# Altium PCB SX1262_e428v03a.PcbDoc
Units mm, origin at the board's own origin, x right, y up, seen from the top; angles counter-clockwise.
Board outline 89 x 58 mm, 4 copper layers (Top Layer, MidLayer1, MidLayer2, Bottom Layer), stack 0.986 mm thick; 72 components, 48 nets, 208 pads, 1257 vias.
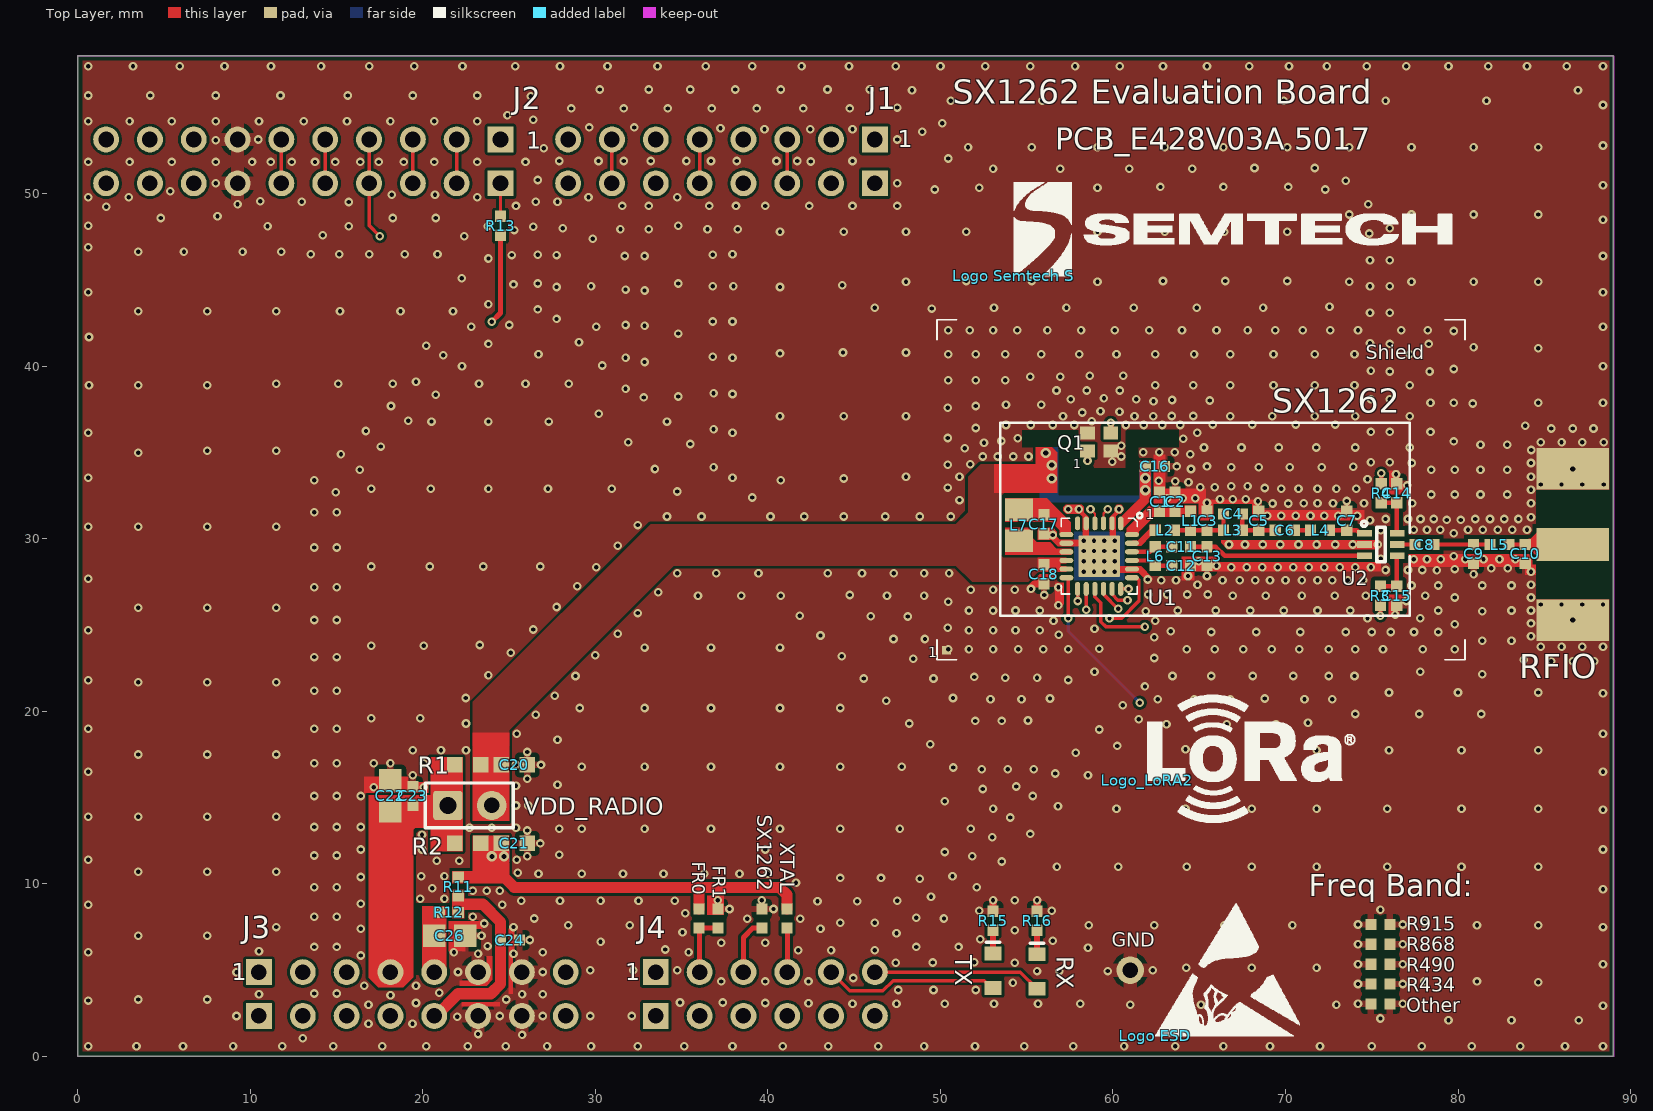
[diagram p0: Top Layer view]
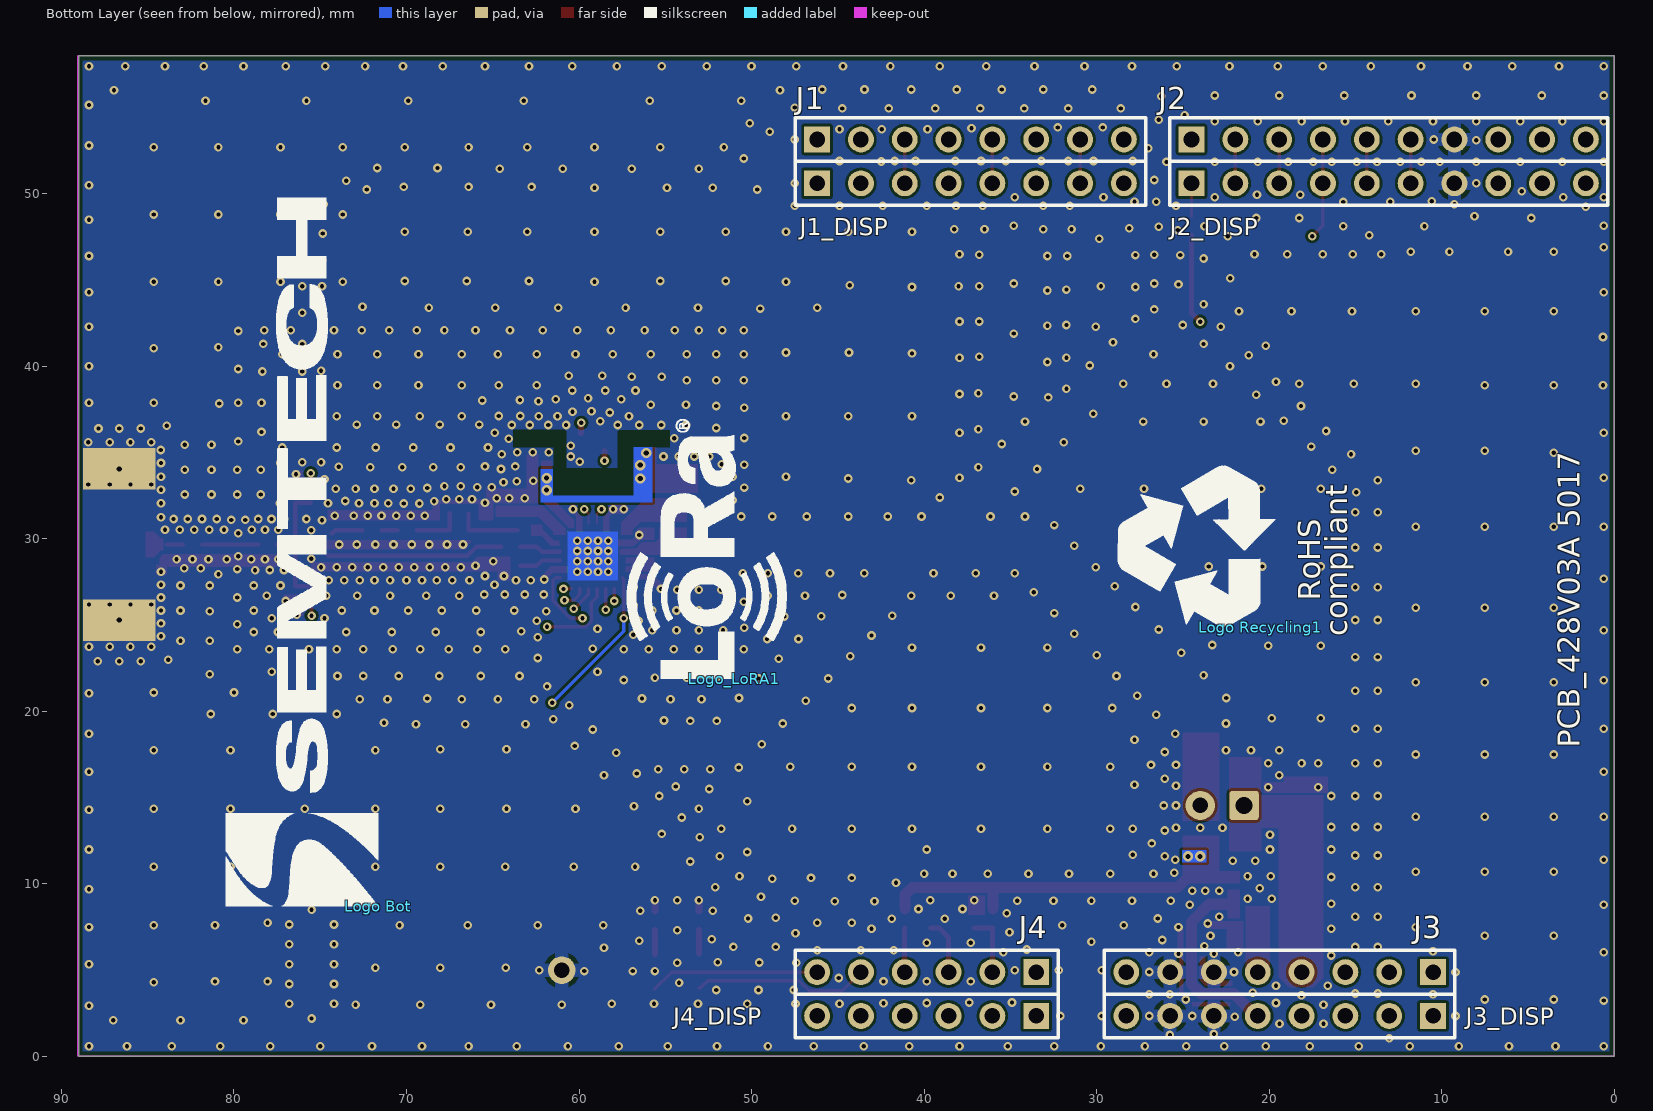
[diagram p1: Bottom Layer view, seen from below]
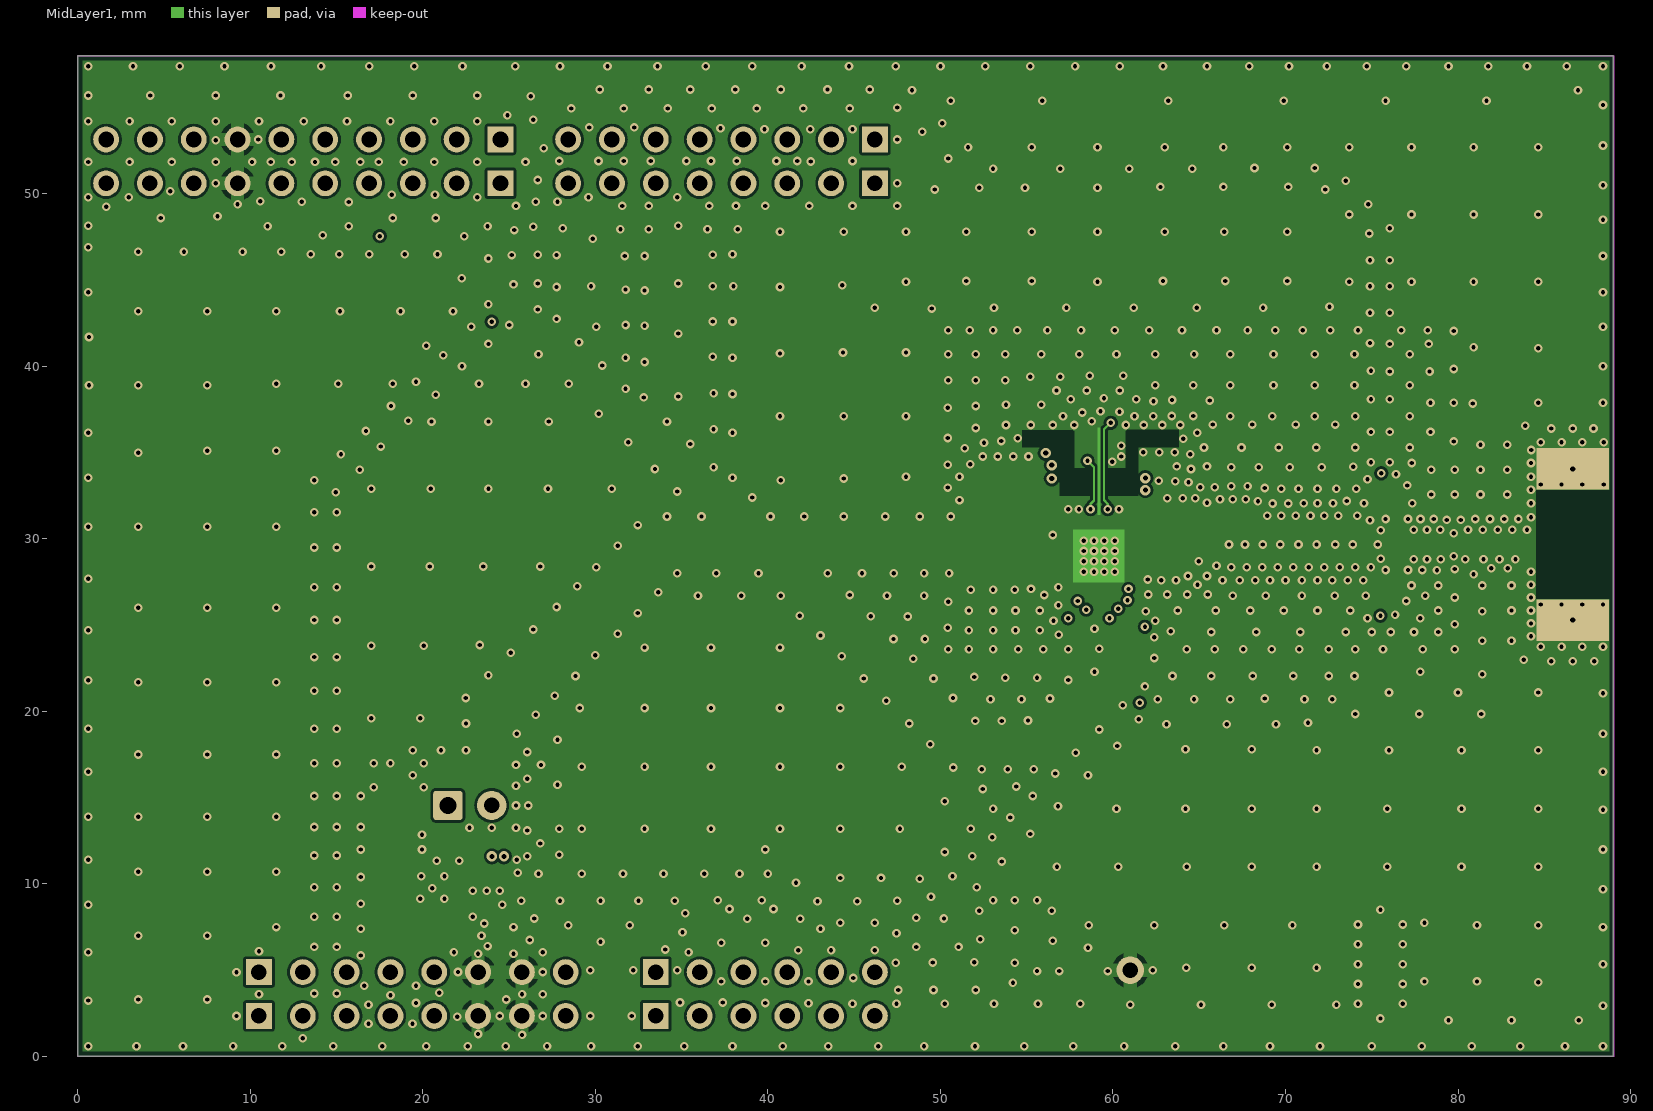
[diagram p2: MidLayer1]
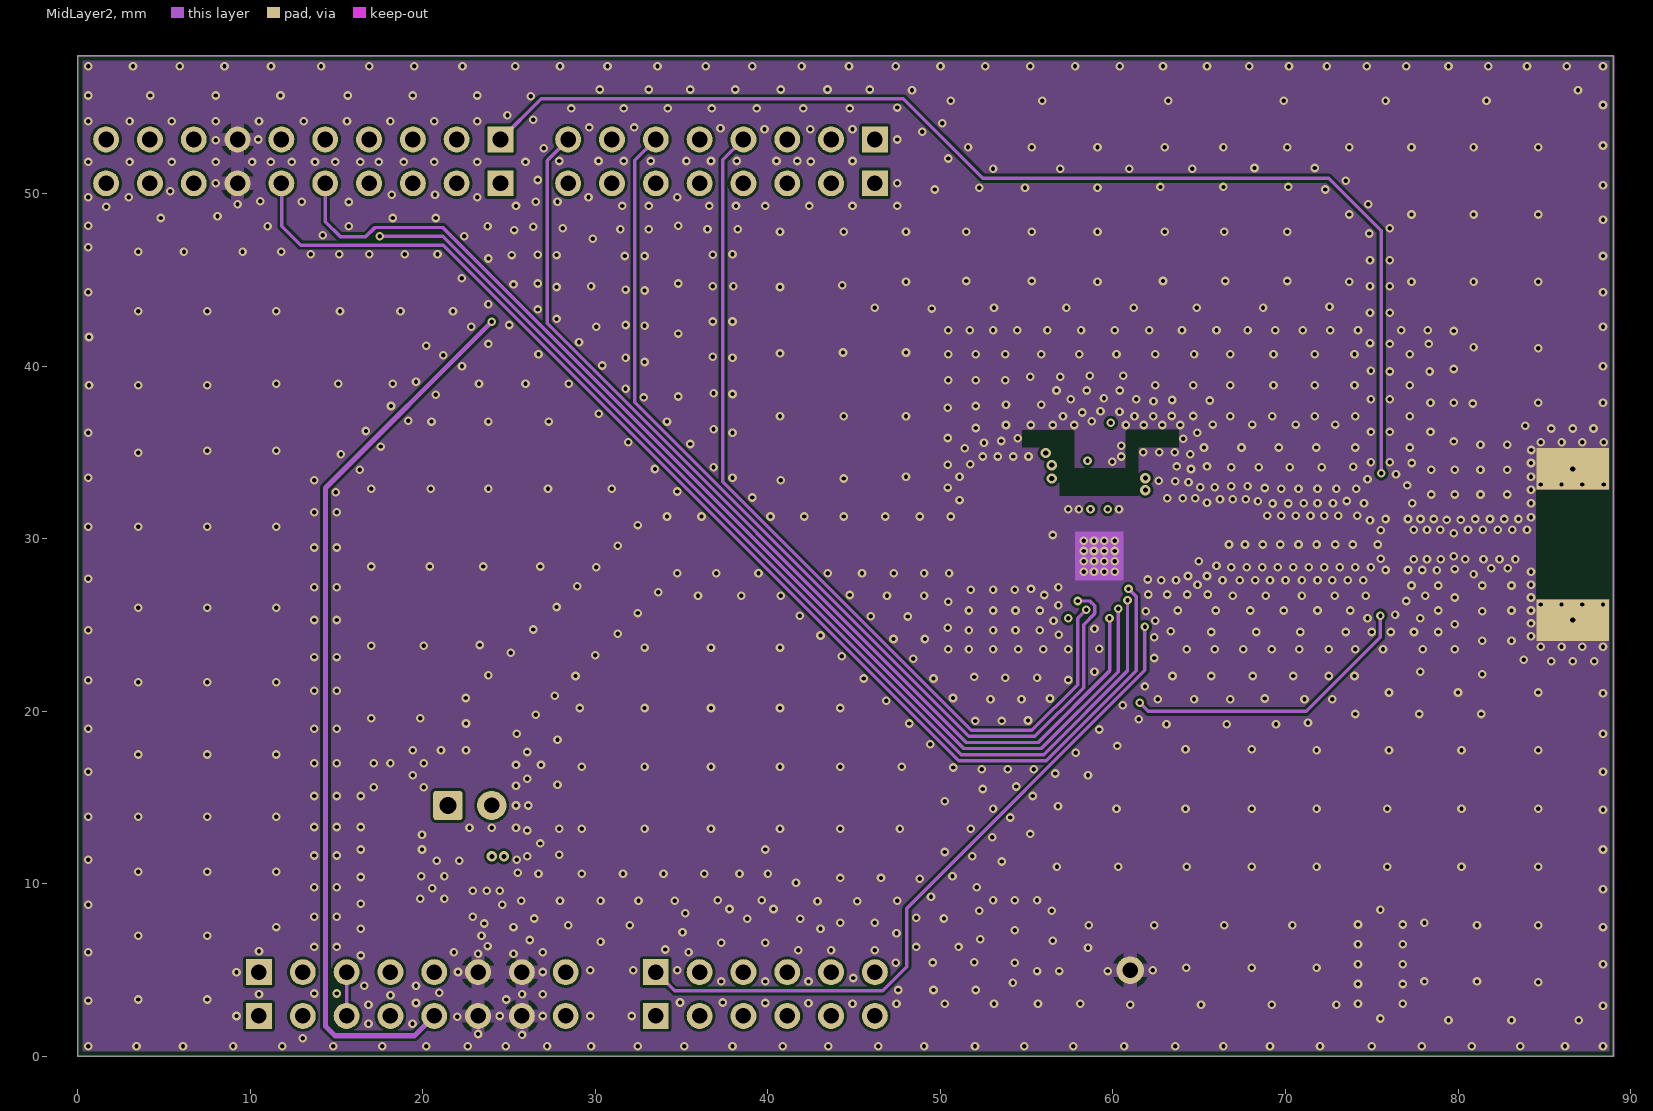
[diagram p3: MidLayer2]

## Layer stack, top to bottom
Top Solder: solder mask 0.0102, Solder Resist, Dk 3.5
Top Layer: signal copper 0.035
Dielectric1: core 0.15, FR-4, Dk 4.4
MidLayer1: signal copper 0.018
Dielectric3: prepreg 0.58, FR-4, Dk 4.4
MidLayer2: signal copper 0.018
Dielectric2: core 0.15, FR-4, Dk 4.4
Bottom Layer: signal copper 0.035
Bottom Solder: solder mask 0.0102, Solder Resist, Dk 3.5

## Board outline
0,0 0,58 89,58 89,0

## Design rules (kind name [scope] priority, off if disabled: settings)
Clearance Clearance_RF_GND [InNet('GND') And OnLayer('Top Layer') And (InPoly) vs InNet('NetL*') or InNet('NetC*') or InNet('NetU*')] p1: gap=0.25 ignorepadtopadclearanceinfootprint=FALSE except(0: Arc-Hole Track-Hole SMDPad-Hole THPad-Hole Via-Hole Fill-Hole Poly-Hole Region-Hole Text-Hole)
Clearance Clearance_GND_Keepout [InNet('GND') vs OnLayer('Keep-Out Layer')] p2: gap=0.15 ignorepadtopadclearanceinfootprint=FALSE except(0: Arc-Hole Track-Hole SMDPad-Hole THPad-Hole Via-Hole Fill-Hole Poly-Hole Region-Hole Text-Hole)
Clearance Clearance_GND [InNet('GND')] p3: gap=0.15 ignorepadtopadclearanceinfootprint=FALSE except(0: Arc-Hole Track-Hole SMDPad-Hole THPad-Hole Via-Hole Fill-Hole Poly-Hole Region-Hole Text-Hole)
Clearance [All] p4: gap=0.15 ignorepadtopadclearanceinfootprint=FALSE except(0: Arc-Hole Track-Hole SMDPad-Hole THPad-Hole Via-Hole Fill-Hole Poly-Hole Region-Hole Text-Hole)
ComponentClearance ComponentClearance_SMA_RFIO [InComponent('RFIO')] p1: gap=0.1 collisioncheckmode=3 verticalgap=0.1 showdistances=FALSE
ComponentClearance [All] p2: gap=0.2 collisioncheckmode=3 verticalgap=0.3 showdistances=FALSE
HoleSize [All] p1: absolutevalues=TRUE maxlimit=3.6 minlimit=0.25 maxpercent=80.000 minpercent=20.000
HoleToHoleClearance [All] p1: gap=0.2 allowstackedmicrovias=TRUE
MinimumSolderMaskSliver [All] p1: minsoldermaskwidth=0.04
PlaneClearance [All] p1: clearance=0.2
PlaneConnect [All] p1: planeconnectstyle=Direct reliefexpansion=0.508 reliefentries=4 reliefconductorwidth=0.254 reliefairgap=0.254
PolygonConnect "PolygonConnect SMD" [InNet('GND') vs HasFootprint('rlc_603_smd') or HasFootprint('rlc_402_smd') or hasFootprint('rlc_805_smd')  or hasFootprint('SOT353-5') or hasFootprint('VQFN24_4X4MM')   or HasFootprint('DFN6_3X3mm')   or HasFootprint('ODFN6_1.65X1.65mm')] p1: connectstyle=Relief reliefconductorwidth=0.4 reliefentries=4 polygonreliefangle="90 Angle" airgapwidth=0.254
PolygonConnect PolygonConnect_comp_diverse [InNet('GND') or  InNet('VDD_MBED') or  InNet('VDD_DISPLAY')  or  InNet('VDD_3V3')  or  InNet('VDD_RADIO')  or  InNet('VUSB') vs HasFootprint('LGM676 LED') or  HasFootprint('BRIDGE_254MM') or  HasFootprint('pin_0.9mm') or HasFootprint('SMA_STRAIGHT')  or  HasFootprint('HDR2X8')   or  HasFootprint('HDR2X6')  or  HasFootprint('HDR1X10') or  HasFootprint('vqfn20_3x3mm') or  HasFootprint('HDR1X9') or  HasFootprint('HDR1X8')  or  HasFootprint('HDR1X6') or  HasFootprint('HDR1X4')] p2: connectstyle=Relief reliefconductorwidth=0.8 reliefentries=4 polygonreliefangle="90 Angle" airgapwidth=0.254
PolygonConnect PolygonConnect_all [All] p3: connectstyle=Direct reliefconductorwidth=0.6 reliefentries=4 polygonreliefangle="90 Angle" airgapwidth=0.254
RoomDefinition SX1262_e428v03a [InComponentClass('SX1262_e428v03a')] p1: confinementstyle=ConfineOut formatcopy=TRUE lockcomponents=FALSE outline 13.5,81.35 13.45,81.4 13.45,124.35 67.45,124.35 67.3,124.2 67.3,81.35
RoutingVias [All] p1: holewidth=0.3 width=0.6 viastyle="Through Hole" minholewidth=0.25 minwidth=0.5 maxholewidth=0.4 maxwidth=0.8
SilkToSilkClearance [All] p1: silktosilkclearance=0.05
SilkToSolderMaskClearance SilkscreenOverComponentPads [IsPad] p1: minsilkscreentomaskgap=0.05 clearancetoexposedcopper=TRUE
SolderMaskExpansion [All] p1: expansion=0.05
Width "Width GND" [InNet('GND')] p1: maxlimit=3 minlimit=0.2 preferedwidth=0.4
Width Width_VCC [InNet('VDD') or  InNet('VDISPLAY') or  InNet('VDD_MBED')  or  InNet('VUSB')  or  InNet('VDD_3V3')] p2: maxlimit=2 minlimit=0.2 preferedwidth=0.8
Width "Width All" [All] p3: maxlimit=2 minlimit=0.127 preferedwidth=0.2
22 further rules are at their usual default settings.

## Components (designator, comment, footprint, x,y, rotation, side; value= is the part's Value field where it differs from the comment)
C1 "Cap" RLC_402_SMD 62.7,32.15 r270 top value=NC
C2 "Cap" RLC_402_SMD 63.6,32.15 r270 top value=NC
C3 "Cap" RLC_402_SMD 65.45,31.05 r270 top value=NC
C4 "Cap" RLC_402_SMD 66.95,31.45 r180 top value=NC
C5 "Cap" RLC_402_SMD 68.45,31.05 r270 top value=NC
C6 "Cap" RLC_402_SMD 69.95,30.5 r180 top value=NC
C7 "Cap" RLC_402_SMD 73.55,31.05 r270 top value=NC
C8 "Cap" RLC_402_SMD 78.05,29.675 r180 top value=NC
C9 "Cap" RLC_402_SMD 80.9,29.125 r90 top value=NC
C10 "Cap" RLC_402_SMD 83.9,29.125 r90 top value=NC
C11 "Cap" RLC_402_SMD 63.95,29.55 r180 top value=NC
C12 "Cap" RLC_402_SMD 63.95,28.45 r180 top value=NC
C13 "Cap" RLC_402_SMD 65.45,29 r90 top value=NC
C14 "Cap" RLC_402_SMD 76.45,32.65 r90 top value=1nF
C15 "Cap" RLC_402_SMD 76.45,26.7 r270 top value=1nF
C16 "Cap" RLC_402_SMD 62.425,34.2 r180 top value=1uF
C17 "Cap" RLC_402_SMD 56,30.85 r90 top value=470nF
C18 "Cap" RLC_402_SMD 56,27.95 r90 top value=100nF
C20 "Cap" rlc_603_smd 25.3,16.9 r180 top value=1uF
C21 "Cap" rlc_603_smd 25.3,12.35 r180 top value=1uF
C22 "Cap" rlc_805_smd 18.12,15.1 r270 top value=10uF
C23 "Cap" RLC_402_SMD 19.42,15.1 r270 top value=100nF
C24 "Cap" RLC_402_SMD 25.05,6.75 r180 top value=1uF
C26 "Cap" rlc_805_smd 21.55,7 r180 top value=10uF
FR0 "Resistor" RLC_402_SMD 36,8 r270 top value=1k
FR1 "Resistor" RLC_402_SMD 37.1,8 r270 top value=NC
GND "Test Pin" pin_0.9mm 61,5 r90 top
J1 "Header 8" HDR1X8 46.2,53.15 r180 bottom locked
J1_DISP "Header 8" HDR1X8 46.2,50.61 r180 bottom locked
J2 "Header 10" HDR1X10 24.5,53.15 r180 bottom locked
J2_DISP "Header 10" HDR1X10 24.5,50.61 r180 bottom locked
J3 "Header 8" HDR1X8 10.5,4.89 r0 bottom locked
J3_DISP "Header 8" HDR1X8 10.5,2.35 r0 bottom locked
J4 "Header 6" HDR1X6 33.5,4.89 r0 bottom locked
J4_DISP "Header 6" HDR1X6 33.5,2.35 r0 bottom locked
L1 "Inductor" RLC_402_SMD 64.5,31.05 r90 top value=0R
L2 "Inductor" RLC_402_SMD 63,30.5 r0 top value=0R
L3 "Inductor" RLC_402_SMD 66.95,30.5 r0 top value=0R
L4 "Inductor" RLC_402_SMD 72,30.5 r0 top value=0R
L5 "Inductor" RLC_402_SMD 82.4,29.675 r0 top value=0R
L6 "Inductor" RLC_402_SMD 62.45,29 r90 top value=0R
L7 "Inductor" "rlc_805_smd enlarged" 54.55,30.8 r270 top value=15uH
"Logo Bot" "Logo symbol" logo_semtech_horiz_size4 71.65,8.7 r90 bottom
"Logo ESD" "Logo symbol" "Logo ESD" 62.454,1.2 r0 top
"Logo Recycling1" "Logo symbol" "Logo Recycling1" 20.527,24.87 r90 bottom
"Logo Semtech S" "Logo symbol" logo_semtech_horiz_size3 54.25,45.25 r0 top
Logo_LoRA1 "Logo symbol" "LOGO LORA SIZE4" 51,21.9 r90 bottom
Logo_LoRA2 "Logo symbol" "LOGO LORA SIZE3" 62,16 r0 top
Other "Resistor" RLC_402_SMD 75.5,3.05 r0 top value=NC
Q1 "Xtal" nd2016da 59.2,35.625 r0 top locked value=32.0MHz
R1 "Resistor" rlc_603_smd 22.6,16.9 r180 top value=NC
R2 "Resistor" rlc_603_smd 22.6,12.35 r180 top value=0R
R3 "Resistor" RLC_402_SMD 75.5,26.7 r270 top value=100R
R4 "Resistor" RLC_402_SMD 75.55,32.65 r90 top value=100R
R11 "Resistor" RLC_402_SMD 22.05,9.85 r270 top value=NC
R12 "Resistor" RLC_402_SMD 21.5,8.35 r0 top value=0R
R13 "Resistor" RLC_402_SMD 24.5,48.15 r90 top value=10k
R15 "Resistor" RLC_402_SMD 53.05,7.871 r270 top value=330R
R16 "Resistor" RLC_402_SMD 55.6,7.871 r270 top value=330R
R434 "Resistor" RLC_402_SMD 75.5,4.2 r0 top value=NC
R490 "Resistor" rlc_402_smd 75.5,5.35 r180 top value=NC
R868 "Resistor" RLC_402_SMD 75.5,6.5 r0 top value=NC
R915 "Resistor" RLC_402_SMD 75.5,7.65 r180 top value=NC
RFIO "SMA" SMA_end_launch_1.0mm_9.52mm 86.65,29.675 r0 top locked
RX "LED" "LGM676 LED" 55.6,4.921 r90 top value=GREEN
Shield "Logo symbol" "BMIS-209-F - SHIELD - SOLDER_MASK" 50.35,23.55 r0 top locked
SX1262 "Resistor" RLC_402_SMD 39.65,8 r270 top value=10k
TX "LED" "LGM676 LED" 53.05,4.971 r90 top value=RED
U1 "SX1262" VQFN24_4X4MM 59.2,29 r270 top
U2 "PE4259 RF Switch" SC70-6 75.525,29.675 r0 top
VDD_RADIO "Jumper" BRIDGE_254MM 21.45,14.55 r0 top
XTAL "Resistor" rlc_402_smd 41.1,8 r270 top value=1k

## Footprints (in the part's own frame and the unit in brackets; to place one, negate y for a bottom-side part, rotate by r counter-clockwise, add the part's x,y. Pads: shape width x height; smd on the part's side, far side on the other; paste and mask are expansions set on the pad)
"BMIS-209-F - SHIELD - SOLDER_MASK" [mm] "BMIS-209-F EMI Gasket - modif SolderMask - Standard Surface Mount Shields -  Laird Technologies"
  rect 0.5x0.5 smd paste-1 mask+0.05: 1(0,0)
  Mechanical 15 keep-out lines w1: 0,0 29.5,0 29.5,18.6 0,18.6 0,0
  silkscreen extent -0.55,-0.55 30.05,19.15, body extent -0.3,-0.3 0.3,0.3, height 0.8
BRIDGE_254MM [mm] "Generic Bridge 2.54mm, 2 Leads 0.9mm;"
  rrect20% 1.7x1.7 hole 1 paste+0 mask+0.05: 1(0,0)
  round 1.7 hole 0.9 paste+0 mask+0.05: 2(2.54,0)
  silkscreen extent -1.3,-1.3 3.8,1.3, body extent -1.4,-1.4 3.9,1.4, height 1
HDR1X6 [mm] "Connector; Header; 6 Position"
  rect 1.5x1.5 hole 0.9: 1(0,0)
  round 1.5 hole 0.9: 2(2.54,0) 3(5.08,0) 4(7.62,0) 5(10.16,0) 6(12.7,0)
  silkscreen extent -1.27,-1.27 13.97,1.27, body extent -0.8,-0.8 13.5,0.8
HDR1X8 [mm] "Connector; Header; 8 Position"
  rect 1.5x1.5 hole 0.9: 1(0,0)
  round 1.5 hole 0.9: 2(2.54,0) 3(5.08,0) 4(7.62,0) 5(10.16,0) 6(12.7,0) 7(15.24,0) 8(17.78,0)
  silkscreen extent -1.27,-1.27 19.05,1.27, body extent -0.8,-0.8 18.58,0.8
HDR1X10 [mm] "Connector; Header; 10 Position"
  rect 1.5x1.5 hole 0.9: 1(0,0)
  round 1.5 hole 0.9: 2(2.54,0) 3(5.08,0) 4(7.62,0) 5(10.16,0) 6(12.7,0) 7(15.24,0) 8(17.78,0) 9(20.32,0) 10(22.86,0)
  silkscreen extent -1.27,-1.27 24.13,1.27, body extent -0.8,-0.8 23.66,0.8
"LGM676 LED" [mm] "Chip Diode; Body 2.1 x 1.4 mm (LxW typ)"
  rect 0.8x1 smd mask+0.05: 1(-1,0) 2(1,0)
  silkscreen extent 1.65,-0.4 1.65,0.4, body extent -1.2,-0.7 1.2,0.7, height 12
"Logo ESD" [mm] "Logo ESD"
  silkscreen extent 0,0 8.38,7.67
"LOGO LORA SIZE3" [mm] "Logo LoRa Size3 - Top Overlay - 14.5x8mm - Registered"
  silkscreen extent 0,-2.44 12.03,4.96
"LOGO LORA SIZE4" [mm] "Logo LoRa Size4 - Top Overlay - 18x9.5mm - Registered"
  silkscreen extent 0,-3.05 15.04,6.2
"Logo Recycling1" [mm] "Logo Recycling1"
  silkscreen extent 0.05,-0.88 9.36,8.2
logo_semtech_horiz_size3 [mm] "Logo semtech horizontal - size3 - L"
  silkscreen extent 0,0 25.4,5.41
logo_semtech_horiz_size4 [mm] "Logo semtech horizontal - size4 - XL"
  silkscreen extent 0,0 41.07,8.79
nd2016da [mm] "Crystal SMD 2.0x1.6mm"
  rect 0.85x0.75 smd mask+0.05: 1(-0.675,-0.525) 2(0.675,-0.525) 3(0.675,0.525) 4(-0.675,0.525)
  body extent -1,-0.8 1,0.8, height 1
pin_0.9mm [mm] "Generic Pin 0.9mm; 1 Lead"
  round 1.6 hole 0.9 mask+0.05: 1(0,0)
RLC_402_SMD [mm] "Chip SMD component 402; Body 1.0 x 0.5 mm (LxW typ)"
  rect 0.65x0.65 smd mask+0.05: 1(-0.55,0) 2(0.55,0)
  body extent -0.87,-0.33 0.87,0.33, height 0.8
rlc_402_smd [mm] "Chip SMD component 402; Body 1.0 x 0.5 mm (LxW typ)"
  rect 0.65x0.65 smd mask+0.05: 1(-0.55,0) 2(0.55,0)
  body extent -0.87,-0.33 0.87,0.33, height 0.8
rlc_603_smd [mm] "Chip SMD component 603; Body 1.6 x 0.8mm (LxW typ)"
  rect 0.9x0.9 smd paste+0 mask+0.05: 1(-0.75,0) 2(0.75,0)
rlc_805_smd [mm] "Chip SMD component 805; Body 2.0 x 1.25 mm (LxW typ)"
  rect 1.3x1.3 smd mask+0.05: 1(-0.9,0) 2(0.9,0)
"rlc_805_smd enlarged" [mm] "Chip SMD component 805; Body 2.0 x 1.25 mm (LxW typ)"
  rect 1.3x1.6 smd mask+0.05: 1(-0.9,0) 2(0.9,0)
SC70-6 [mm] "SC70 6-Leads, Body 2.0x1.25mm, Pitch 0.65mm"
  rect 0.85x0.4 smd mask+0.05: 1(-0.95,0.65) 2(-0.95,0) 3(-0.95,-0.65) 4(0.95,-0.65) 5(0.95,0) 6(0.95,0.65)
  silkscreen extent -1.12,-1 0.25,1.35, body extent -0.63,-1 0.63,1, height 1.45
SMA_end_launch_1.0mm_9.52mm [mm] "SMA end launch for 1.0mm PCB thickness; 9.52mm"
  rect 4.2x1.905 smd mask+0.05: 1(0,0)
  rect 4.2x2.413 hole 0.3 mask+0.05: 2(0,-4.38) 2(0,4.38)
VQFN24_4X4MM [mm] "24 Leads, Body 4.0x4.0mm, Pitch 0.50mm, VQFN24"
  oval 0.8x0.3 smd mask+0.05: 1(-1.9,1.25) 2(-1.9,0.75) 3(-1.9,0.25) 4(-1.9,-0.25) 5(-1.9,-0.75) 6(-1.9,-1.25) 13(1.9,-1.25) 14(1.9,-0.75) 15(1.9,-0.25) 16(1.9,0.25) 17(1.9,0.75) 18(1.9,1.25)
  oval 0.3x0.8 smd mask+0.05: 7(-1.25,-1.9) 8(-0.75,-1.9) 9(-0.25,-1.9) 10(0.25,-1.9) 11(0.75,-1.9) 12(1.25,-1.9) 19(1.25,1.9) 20(0.75,1.9) 21(0.25,1.9) 22(-0.25,1.9) 23(-0.75,1.9) 24(-1.25,1.9)
  rrect5% 2.4x2.4 smd paste-2.5 mask+0.05: 25(0,0)
  Mechanical 15 keep-out lines w0.1: 2.5,-2.5 2.5,2.5 -2.5,2.5 -2.5,-2.5 2.5,-2.5
  silkscreen extent -2.5,-2.2 2.2,2.5, body extent -2,-2 2,2, height 1

## Part data
C1 C2 C3 C4 C5 C6 C7 C8 C9 C10 C11 C12 C13 C14 C15 C16 C17 C18 C20 C21 C22 C23 C24 C26: "Capacitor SMD", LatestRevisionDate="05-oct-2007  -  Semtech", LatestRevisionNote="Re-released for DXP Platform.", Published=8-Jun-2000, Publisher="Altium Limited"
FR0 FR1 Other R1 R2 R3 R4 R11 R12 R13 R15 R16 R434 R490 R868 R915 SX1262 XTAL: "Resistor SMD - IEC symbol version", LatestRevisionDate="27-Jul-20  -  Semtech"
GND: library part test_pin, LatestRevisionDate="05-oct-2007  -  Semtech"
J1 J1_DISP J3 J3_DISP: "Header, 8-Pin", LatestRevisionDate=17-Jul-2002, LatestRevisionNote="Re-released for DXP Platform.", Publisher="Altium Limited"
J2 J2_DISP: "Header, 10-Pin", LatestRevisionDate=17-Jul-2002, LatestRevisionNote="Re-released for DXP Platform.", Publisher="Altium Limited"
J4 J4_DISP: "Header, 6-Pin", LatestRevisionDate=17-Jul-2002, LatestRevisionNote="Re-released for DXP Platform.", Publisher="Altium Limited"
L1 L2 L3 L4 L5 L6 L7: "Inductor SMD", Code_IEC=1005, Code_JEITA=0402, LatestRevisionDate="05-oct-2007  -  Semtech", LatestRevisionNote="Re-released for DXP Platform.", Published=8-Jun-2000, Publisher="Altium Limited"
"Logo Bot" "Logo ESD" "Logo Recycling1" "Logo Semtech S" Logo_LoRA1 Logo_LoRA2: library part Logo, "Schematic symbol for Logo"
Q1: library part "Xtal GND", "Crystal with GND pins", LatestRevisionDate="05-oct-2007  -  Semtech"
RFIO: "SMA Straight Connector", LatestRevisionDate="05-oct-2007  -  Semtech", LatestRevisionNote="Re-released for DXP Platform.", Publisher="Altium Limited"
Shield: library part Shield, "Shield - EMI Gasket - Standard Surface Mount Shields"
U1: library part SX126x, "SX1262- Ultra low power RF transceiver"
U2: "PE4259 Peregrine RF Switch", LatestRevisionDate="03-Sep-2012 -  Semtech"
VDD_RADIO: "Jumper Wire", LatestRevisionDate="05-oct-2007  -  Semtech"
RX TX: LatestRevisionDate="05-oct-2007  -  Semtech"

## Via types
v1: diameter 0.5, hole 0.25, Top Layer to Bottom Layer, tented both sides, 1234 vias
v2: diameter 0.5, hole 0.25, Top Layer to Bottom Layer, tented top, 16 vias
v3: diameter 0.6, hole 0.3, Top Layer to Bottom Layer, tented both sides, 7 vias

## Nets (pads, with @x,y where several pads share a name; then routed paths per layer and width w, separated by ;. In a path a pad name is that pad's centre, name@x,y a point inside that pad or via, vN(x,y) a via of type N, cw(c..) or ccw(c..) an arc to the next point about the centre after c; other vN are vias at no path point)
ANT_SW: J2.1 R4.2 | length 69.8
  Top Layer w0.25: R4.2 v1(75.55,33.8)
  MidLayer2 w0.2: J2.1 26.85,55.5 47.85,55.5 52.45,50.9 72.5,50.9 75.55,47.85 v1(75.55,33.8)
BUSY: J1.4 U1.14 | length 53.7
  Top Layer w0.2: v1(58.45,25.9) U1.14
  MidLayer2 w0.2: J1.4@38.575,53.15 37.39,51.965 37.39,33.305 51.795,18.9 55.3,18.9 57.95,21.55 57.95,25.4 v1(58.45,25.9)
DIO1: J1.6 U1.13 | length 57.8
  Top Layer w0.2: v1(57.95,26.4) U1.13
  MidLayer2 w0.2: J1.6 32.286,51.936 32.286,37.914 51.65,18.55 55.475,18.55 58.3,21.375 58.3,25.025 58.95,25.675 58.95,26.114 58.664,26.4 v1(57.95,26.4)
DIO2: R3.2 U1.12 | length 26.8
  Top Layer w0.2: v1(57.4,25.4) 57.4,27.65 U1.12@57.5,27.75
  Top Layer w0.25: v1(75.5,25.55) R3.2
  MidLayer2 w0.2: v1(61.55,20.5) 62.05,20 71.199,20 75.5,24.301 v1(75.5,25.55)
  Bottom Layer w0.2: v1(57.4,25.4) 57.399,24.651 v1(61.55,20.5)
DIO3: U1.6
DISP_RESET: J3.3 J3_DISP.3 | length 2.5
  Top Layer w0.3: J3.3@15.58,4.87 J3.3@15.6,4.89
  MidLayer2 w0.2: J3_DISP.3 J3.3@15.58,4.87
F_CS: J1.7 J1_DISP.7 | length 2.6
  Top Layer w0.2: J1.7@30.95,53.175 30.96,53.165 J1.7 J1_DISP.7
GND: C1.1 C2.1 C3.1 C5.1 C7.1 C9.1 C10.1 C12.1 C13.1 C14.2 C15.2 C16.1 C17.1 C18.1 C20.1 C21.1 C22.1 C23.1 C24.1 C26.1 FR1.1 GND.1 J2.7 J2_DISP.7 J3.6 J3.7 J3_DISP.6 J3_DISP.7 Other.1 Other.2 Q1.2 Q1.4 R15.1 R16.1 R434.1 R434.2 R490.1 R490.2 R868.1 R868.2 R915.1 R915.2 RFIO.2 Shield.1 SX1262.1 U1.2 U1.5 U1.8 U1.20 U1.25 U2.2 | length 5.3
  Top Layer w0.3: U1.8 U1.25@58.3,29.75 ; U1.25@58.45,29.85 U1.5 ; U1.25@59.95,29.9 U1.2 ; U1.25@60.1,28.2 60.15,28.25 U1.20
  Top Layer w0.4: R15.1 v1@53.05,9.021 ; R16.1 v1(55.6,9.05)
  other v1: 0.6,0.6 3.4,0.6 6.1,0.6 9,0.6 11.85,0.6 14.8,0.6 17.65,0.6 20.2,0.6 22.6,0.6 24.8,0.6 27.2,0.6 29.75,0.6 32.45,0.6 35.15,0.6 37.95,0.6 40.85,0.6 43.5,0.6 46.4,0.6 49.05,0.6 52,0.6 54.85,0.6 57.7,0.6 60.643,0.6 63.6,0.6 66.4,0.6 69.1,0.6 72,0.6 75,0.6 77.9,0.6 80.8,0.6 83.6,0.6 86.2,0.6 88.4,0.6 13.04,1.05 25.75,1.25 23.2,1.3 16.85,1.9 19.4,1.9 79.45,2.1 83.1,2.1 87,2.1 75.5,2.2 22,2.3 9.2,2.35 24.45,2.35 26.95,2.35 29.7,2.35 32.1,2.35 88.4,2.938 16.85,3 61,3 65.1,3 69.2,3 72.95,3 44.9,3.05 47.45,3.05 50.25,3.05 53.1,3.05 55.65,3.05 58.1,3.05 74.2,3.05 76.8,3.05 19.6,3.1 39.85,3.1 42.35,3.088 34.9,3.13 37.39,3.13 0.6,3.241 3.5,3.3 7.5,3.3 24.829,3.3 18.125,3.55 10.5,3.6 25.75,3.6 26.95,3.6 13.7,3.65 15,3.65 20.95,3.7 47.55,3.85 49.6,3.85 52.05,3.85 16.6,4.1 19.6,4.1 74.2,4.2 76.8,4.2 54.2,4.279 84.65,4.3 37.3,4.35 39.85,4.35 42.35,4.35 78.05,4.35 81.1,4.35 44.95,4.55 9.2,4.89 22.035,4.9 26.95,4.9 55.6,4.95 56.886,4.95 59.7,4.95 29.7,5 32.2,5 34.75,5 62.3,5 64.25,5.15 68.05,5.15 71.8,5.15 88.4,5.338 74.2,5.35 76.8,5.35 47.4,5.435 54.3,5.435 49.55,5.45 51.95,5.464 16.4,5.85 23.2,5.95 25.25,5.95 0.6,6.05 21.8,6.05 26.95,6.05 35.4,6.05 10.5,6.1 41.75,6.15 43.66,6.15 46.2,6.15 34.046,6.2 58.55,6.3 13.7,6.35 15,6.35 48.6,6.35 51.05,6.35 23.75,6.4 74.2,6.5 76.8,6.5 37.3,6.6 39.85,6.6 30.3,6.65 56.5,6.7 26.2,6.75 52.3,6.8 3.5,7 7.5,7 23.4,7 47.45,7.15 35.05,7.2 54.3,7.321 16.4,7.4 43.05,7.4 11.5,7.5 25.25,7.5 88.4,7.5 28.42,7.6 32,7.6 58.6,7.6 62.4,7.6 66.45,7.6 70.4,7.6 81.1,7.6 84.65,7.6 74.2,7.65 76.8,7.65 23.55,7.709 44.2,7.75 46.2,7.75 78.05,7.75 38.8,7.982 41.875,7.98 26.45,8 50.2,8 48.6,8.05 13.7,8.1 15,8.1 22.9,8.1 35.2,8.3 52.25,8.45 56.45,8.45 75.5,8.5 37.775,8.55 40.325,8.55 0.6,8.8 24.6,8.8 16.4,8.85 25.7,9.021 27.95,9.021 30.3,9.021 32.5,9.021 34.6,9.021 42.875,9 45.175,9 47.5,9.021 37.1,9.05 39.65,9.05 53.05,9.05 54.3,9.05 19.85,9.15 21.25,9.15 49.45,9.25 22.9,9.6 23.7,9.6 24.45,9.6 88.4,9.7 20.55,9.75 13.7,9.8 15,9.8 52.1,9.8 41.625,10.075 48.8,10.3 44.2,10.35 46.55,10.35 16.4,10.4 19.9,10.45 21.25,10.45 50.7,10.45 26.7,10.6 29.2,10.6 31.6,10.6 33.95,10.6 36.3,10.6 38.35,10.6 40,10.6 25.5,10.65 3.5,10.7 7.5,10.7 11.5,10.7 56.75,11 60.3,11 64.275,11 68.05,11 71.8,11 75.9,11 80.2,11 84.65,11 53.55,11.3 20.8,11.35 22.1,11.35 0.6,11.4 25.45,11.4 26.05,11.6 51.85,11.6 13.7,11.65 15,11.65 27.9,11.7 50.25,11.85 16.4,12 19.95,12 39.85,12 88.4,12 26.8,12.35 53,12.7 19.95,12.85 55.2,12.9 26.05,13.1 27.9,13.2 29.2,13.2 32.85,13.2 36.7,13.2 40.7,13.2 44.2,13.2 47.65,13.2 51.75,13.2 22.7,13.25 24,13.25 25.4,13.25 13.7,13.3 15,13.3 16.4,13.3 54.05,13.85 0.6,13.9 3.5,13.9 7.5,13.9 11.5,13.9 88.4,14.3 53.05,14.35 60.2,14.35 64.2,14.35 68.05,14.35 71.8,14.35 75.9,14.35 80.2,14.35 84.65,14.35 56.81,14.5 25.4,14.55 26.1,14.55 50.25,14.8 13.7,15.1 15,15.1 16.4,15.1 55.35,15.1 52.45,15.5 17.15,15.6 20.05,15.6 54.4,15.65 25.4,15.7 27.8,15.75 26.05,16.1 19.42,16.3 58.55,16.3 56.65,16.4 0.6,16.5 88.4,16.5 52.4,16.65 53.9,16.65 55.4,16.65 50.75,16.75 29.2,16.8 32.85,16.8 36.7,16.8 40.7,16.8 44.2,16.8 47.75,16.8 25.4,16.9 26.85,16.9 13.7,17 15,17 17.15,17 18.12,17 20.05,17 3.5,17.5 7.5,17.5 11.5,17.5 57.85,17.6 26.05,17.65 19.42,17.75 21.05,17.75 22.5,17.75 71.8,17.75 76,17.75 80.2,17.75 84.65,17.75 64.2,17.8 68.05,17.8 60.25,18 49.4,18.1 27.8,18.35 25.45,18.7 88.4,18.7 59.2,18.95 0.6,19 13.7,19 15,19 63.1,19.25 66.6,19.25 69.45,19.25 22.5,19.3 48.2,19.3 71.3,19.35 52.025,19.45 53.55,19.45 55.075,19.475 61.5,19.55 17,19.6 19.85,19.6 26.55,19.8 74.05,19.85 77.75,19.85 81.35,19.85 29.1,20.2 32.85,20.2 36.7,20.2 40.7,20.2 44.2,20.2 60.574,20.35 46.85,20.625 52.9,20.7 54.7,20.7 62.6,20.7 64.7,20.7 66.8,20.7 71.1,20.7 72.7,20.7 56.35,20.75 68.8,20.75 22.477,20.78 50.725,20.775 27.65,20.9 88.4,21.05 76,21.1 80,21.1 84.65,21.1 13.7,21.2 15,21.2 61.85,21.45 3.5,21.7 7.5,21.7 11.5,21.7 0.6,21.8 57.4,21.825 45.55,21.907 49.6,21.907 53.75,21.95 55.6,21.95 51.95,22 28.85,22.05 63.45,22.05 65.7,22.05 68.1,22.05 70.45,22.05 72.5,22.05 74,22.05 23.8,22.1 81.4,22.15 58.925,22.3 77.8,22.3 85.4,22.9 86.65,22.9 87.9,22.9 83.8,23 48.425,23.05 62.4,23.1 13.7,23.15 15,23.15 44.275,23.2 30,23.25 25.1,23.4 50.45,23.6 51.65,23.6 53.05,23.6 54.5,23.6 55.95,23.6 57.4,23.6 64.275,23.6 65.9,23.6 67.55,23.6 69.2,23.6 70.8,23.6 72.5,23.6 74.05,23.6 75.65,23.6 77.95,23.6 79.8,23.6 59.2,23.625 32.85,23.7 36.7,23.7 40.7,23.7 84.8,23.75 86,23.75 87.2,23.75 88.4,23.75 17,23.8 20.05,23.8 23.3,23.85 81.4,24.1 83.1,24.1 47.275,24.2 49.1,24.2 62.4,24.3 84.225,24.35 43.05,24.4 56.85,24.45 31.3,24.5 65.7,24.6 68.3,24.6 70.85,24.6 73.5,24.6 75,24.6 76.1,24.6 77.45,24.6 78.85,24.6 63.35,24.65 0.6,24.7 51.65,24.7 53.05,24.7 54.35,24.7 55.75,24.7 26.4,24.75 58.925,24.8 50.425,24.85 79.8,25.05 84.225,25.1 56.55,25.25 62.45,25.25 13.7,25.3 15,25.3 74.75,25.4 77.8,25.4 48.1,25.5 45.968,25.525 41.85,25.55 76.35,25.6 32.45,25.7 61.9,25.8 81.4,25.8 51.65,25.85 53.05,25.85 54.35,25.85 55.75,25.85 63.75,25.85 65.95,25.85 67.95,25.85 69.9,25.85 71.85,25.85 73.75,25.85 78.85,25.85 83.1,25.85 84.225,25.85 3.5,26 7.5,26 11.5,26 27.75,26.05 56.837,26.15 84.8,26.2 86,26.2 87.2,26.2 88.4,26.2 50.45,26.35 77,26.4 79.8,26.6 84.225,26.6 35.95,26.7 38.45,26.7 40.75,26.7 46.9,26.7 49.05,26.7 66.95,26.7 68.85,26.7 70.95,26.7 72.85,26.7 74.65,26.7 78.1,26.7 44.75,26.75 56.011,26.75 62.05,26.775 63.15,26.775 64.3,26.775 65.5,26.775 33.65,26.9 51.75,27.05 53.05,27.05 54.3,27.05 55.25,27.1 13.7,27.2 15,27.2 56.837,27.2 28.95,27.25 77.3,27.3 78.85,27.3 81.4,27.3 83.1,27.3 64.9,27.35 84.225,27.35 62.8,27.6 63.65,27.6 66.35,27.6 67.35,27.6 68.25,27.6 69.1,27.6 70,27.6 70.95,27.6 71.85,27.6 72.7,27.6 73.6,27.6 74.5,27.6 62.016,27.65 0.6,27.696 64.35,27.85 65.45,27.85 80.9,27.95 34.75,28 37,28 39.45,28 43.475,28 45.45,28 47.3,28 49.05,28 50.5,28 84.225,28.1 78.775,28.175 75.8,28.2 77.1,28.2 77.925,28.2 79.8,28.25 81.925,28.3 82.875,28.3 30.05,28.35 66.85,28.35 67.75,28.35 68.65,28.35 69.55,28.35 70.45,28.35 71.35,28.35 72.25,28.35 73.15,28.35 74.05,28.35 74.95,28.35 17,28.4 20.4,28.4 23.5,28.4 26.8,28.4 66,28.45 64.975,28.7 77.425,28.825 78.2,28.825 79,28.825 80.425,28.825 81.475,28.825 82.4,28.825 83.325,28.825 75.525,28.85 79.75,29 13.7,29.5 15,29.5 31.3,29.6 66.725,29.675 67.65,29.675 68.675,29.675 69.7,29.675 70.75,29.675 71.8,29.675 72.875,29.675 73.9,29.675 75.35,29.675 56.5,30.225 79.75,30.325 75.525,30.5 77.425,30.525 78.2,30.525 78.975,30.525 80.575,30.525 81.425,30.525 82.3,30.525 83.15,30.525 84,30.525 0.6,30.7 3.5,30.7 7.5,30.7 11.5,30.7 32.45,30.8 74.9,31.075 79.35,31.1 80.15,31.1 75.8,31.15 77.1,31.15 77.825,31.15 78.6,31.15 81,31.15 81.85,31.15 82.675,31.15 83.5,31.15 84.225,31.25 34.15,31.3 36.15,31.3 40.15,31.3 42.1,31.3 44.4,31.3 46.8,31.3 48.8,31.3 50.6,31.3 68.95,31.35 69.75,31.35 70.6,31.35 71.45,31.35 72.25,31.35 73.05,31.35 74.15,31.35 13.7,31.55 15,31.55 57.4,31.725 58.025,31.725 60.35,31.725 69.25,32.05 70.15,32.05 71.05,32.075 71.85,32.075 72.75,32.075 74.55,32.075 77.35,32.075 84.225,32.075 65.45,32.1 68.4,32.175 73.55,32.2 51.1,32.25 66.2,32.3 66.95,32.3 67.7,32.3 63.15,32.35 64.05,32.35 64.775,32.35 39.1,32.4 78.45,32.575 79.8,32.575 81.3,32.575 82.85,32.575 14.955,32.7 34.75,32.75 84.225,32.85 17,32.9 20.45,32.9 23.8,32.9 27.25,32.9 30.95,32.9 69.75,32.9 70.75,32.9 71.85,32.9 72.95,32.9 74.1,32.9 68.8,32.95 50.425,32.975 65.05,33 65.9,33 66.85,33.05 67.8,33.05 77.05,33.1 84.8,33.15 86,33.15 87.2,33.15 88.45,33.15 64.375,33.28 63.6,33.35 62.65,33.375 13.7,33.4 40.75,33.4 74.75,33.45 44.4,33.5 0.6,33.55 37.95,33.55 48,33.6 51.1,33.6 84.225,33.6 76.4,33.75 16.35,34 78.45,34 79.8,34 81.3,34 82.85,34 33.45,34.05 64.525,34.05 36.85,34.15 66.85,34.15 68.45,34.15 70.25,34.15 72.1,34.15 73.925,34.175 63.7,34.2 65.45,34.2 50.425,34.3 51.725,34.325 77.325,34.4 84.225,34.4 74.95,34.45 76.05,34.45 59.95,34.475 52.45,34.775 53.325,34.775 54.225,34.775 55.1,34.775 60.475,34.775 15.25,34.9 64.475,34.9 3.5,35 61.75,35.025 62.675,35.025 63.575,35.025 7.5,35.1 11.5,35.1 84.25,35.15 51.4,35.25 65.275,35.3 67.45,35.3 69.6,35.3 71.775,35.3 74.05,35.3 77.2,35.3 17.55,35.35 60.475,35.4 81.3,35.45 82.85,35.45 35.5,35.5 52.525,35.575 31.9,35.6 84.8,35.6 86,35.6 87.2,35.6 88.45,35.6 79.75,35.65 53.525,35.675 64.075,35.8 54.475,35.825 50.425,35.85 0.6,36.15 37.95,36.15 64.875,36.15 74.95,36.2 76.05,36.2 78.4,36.2 16.7,36.25 36.85,36.35 85.4,36.4 86.65,36.4 87.85,36.4 52.05,36.425 83.9,36.55 53.8,36.6 55.225,36.6 56.5,36.6 57.75,36.6 60.75,36.6 61.775,36.6 62.85,36.6 63.9,36.6 65.775,36.625 68.075,36.625 70.6,36.625 72.875,36.625 20.5,36.8 23.8,36.8 27.3,36.8 34.15,36.8 58.775,36.825 19.15,36.85 40.7,37.1 44.4,37.1 48,37.1 57.1,37.1 61.25,37.1 62.325,37.1 66.8,37.1 69.225,37.1 71.7,37.1 74.05,37.1 77.2,37.1 63.4,37.125 64.65,37.125 30.2,37.25 58.225,37.325 60.375,37.375 59.275,37.4 50.425,37.6 18.15,37.7 52.05,37.7 53.8,37.775 55.85,37.775 80.85,37.85 78.4,37.9 79.75,37.9 84.65,37.9 88.4,37.9 62.35,37.975 65.6,38.025 63.425,38.05 57.55,38.1 61.35,38.1 74.95,38.1 76.05,38.1 59.475,38.15 32.8,38.2 34.8,38.25 20.75,38.35 37.95,38.4 36.85,38.45 56.725,38.6 58.475,38.6 60.4,38.6 31.75,38.7 0.65,38.9 3.5,38.9 7.5,38.9 62.45,38.9 64.65,38.9 66.8,38.9 69.3,38.9 71.7,38.9 74,38.9 77.2,38.9 11.5,39 15.1,39 18.25,39 23.25,39 25.95,39 28.45,39 19.6,39.1 50.45,39.2 52.05,39.2 53.75,39.2 55.2,39.4 56.95,39.4 58.65,39.45 60.6,39.45 76.05,39.7 78.35,39.7 74.95,39.75 79.75,39.85 22.265,40 88.4,40 30.4,40.05 32.85,40.25 31.75,40.5 37.95,40.5 36.8,40.55 21.183,40.65 26.7,40.7 50.45,40.7 52.05,40.7 53.75,40.7 55.85,40.7 58.05,40.7 60.2,40.7 62.45,40.7 64.7,40.7 66.8,40.7 69.3,40.7 71.7,40.7 74,40.7 77.2,40.7 40.7,40.75 44.35,40.8 48,40.8 84.65,41.05 80.9,41.1 20.2,41.2 23.8,41.3 76.05,41.3 78.3,41.3 74.9,41.35 29.05,41.4 0.65,41.7 34.8,41.9 79.75,42.05 50.45,42.1 51.7,42.1 53.05,42.1 54.45,42.1 56.2,42.1 58.15,42.1 60.1,42.1 62.1,42.1 64,42.1 66,42.1 67.8,42.1 69.4,42.1 71,42.1 72.6,42.1 74.2,42.1 76.7,42.1 78.25,42.1 22.8,42.3 30.05,42.3 88.4,42.3 32.85,42.35 25,42.4 31.75,42.4 36.8,42.6 37.95,42.6 27.75,42.75 74.9,43.1 76.05,43.1 3.5,43.2 7.5,43.2 11.5,43.2 15.2,43.2 18.7,43.2 21.75,43.2 26.65,43.3 49.5,43.35 46.2,43.4 53.1,43.4 57.3,43.4 61.2,43.4 64.85,43.4 68.7,43.4 72.55,43.45 23.8,43.6 0.6,44.3 88.4,44.3 32.85,44.4 31.75,44.45 27.75,44.6 40.7,44.6 29.75,44.65 36.8,44.65 38,44.65 74.9,44.65 76.05,44.65 44.3,44.7 25.25,44.75 26.65,44.8 34.8,44.8 48,44.9 59.1,44.9 73.7,44.9 77.3,44.9 80.9,44.9 84.65,44.9 51.5,44.95 55.291,44.95 62.9,44.95 66.5,44.95 70.1,44.95 22.25,45.1 74.9,46.15 76.05,46.15 23.8,46.25 31.7,46.4 32.85,46.4 88.4,46.4 25.15,46.45 27.75,46.45 26.65,46.464 36.8,46.464 13.5,46.5 15.15,46.5 16.9,46.5 18.95,46.5 20.85,46.5 37.95,46.5 3.5,46.65 6.15,46.65 9.55,46.65 11.8,46.65 0.6,46.9 29.85,47.4 22.4,47.546 14.2,47.6 74.85,47.7 40.7,47.8 44.4,47.8 48,47.8 51.5,47.8 55.3,47.8 59.1,47.8 63,47.8 66.45,47.8 70.1,47.8 25.3,47.9 31.45,47.95 33.1,47.95 36.5,47.95 38.25,47.95 28.1,48 76.05,48 26.4,48.1 11,48.125 15.7,48.125 23.75,48.125 0.6,48.15 34.8,48.15 88.4,48.5 4.8,48.6 18.25,48.6 20.75,48.6 8.1,48.7 73.7,48.8 77.3,48.8 80.9,48.8 84.65,48.8 1.65,49.25 25.4,49.3 31.55,49.3 33.1,49.3 36.6,49.3 38.15,49.3 39.85,49.3 42.4,49.3 44.9,49.3 47.5,49.3 9.26,49.4 74.8,49.4 15.7,49.525 12.975,49.55 26.55,49.55 27.8,49.55 10.575,49.575 0.6,49.803 2.95,49.803 23.15,49.803 29.6,49.8 34.75,49.8 18.2,49.95 20.7,49.95 5.35,50.15 49.675,50.25 72.3,50.25 52.25,50.35 54.9,50.35 59.1,50.35 62.75,50.4 66.4,50.4 70.15,50.4 88.4,50.5 8,50.61 47.5,50.61 73.5,50.75 26.65,50.8 53.05,51.45 56.95,51.45 60.95,51.45 64.6,51.45 68.2,51.5 71.7,51.5 0.6,51.85 3,51.85 5.45,51.85 8,51.85 10.1,51.85 11.175,51.85 12.4,51.85 13.75,51.85 14.925,51.85 16.375,51.85 17.45,51.85 18.9,51.85 20.66,51.85 23.15,51.85 25.95,51.85 42.475,51.875 27.9,51.9 30.18,51.9 31.65,51.9 33.2,51.9 35.275,51.9 36.7,51.9 38.2,51.9 40.5,51.9 41.7,51.9 44.9,51.9 50.45,52.05 27,52.65 51.6,52.7 55.3,52.7 59.1,52.7 63,52.7 66.4,52.7 70.1,52.7 73.7,52.7 77.3,52.7 80.9,52.7 84.65,52.7 88.4,52.8 8,53.1 10.45,53.15 47.5,53.15 48.95,53.6 39.8,53.75 42.45,53.75 44.9,53.75 37.25,53.8 29.65,53.85 32.25,53.85 50.1,54.1 0.6,54.2 3,54.2 5.45,54.2 8,54.2 10.5,54.2 13.1,54.2 15.6,54.2 18.12,54.2 20.66,54.2 23.15,54.2 26.4,54.3 24.9,54.55 28.6,54.95 31.65,54.95 34.2,54.95 36.75,54.95 39.35,54.95 42.05,54.95 44.75,54.95 47.5,55 88.4,55.15 50.6,55.4 55.9,55.4 63.2,55.4 69.9,55.4 75.8,55.4 81.65,55.4 26.25,55.65 0.6,55.7 4.2,55.7 8,55.7 11.75,55.7 15.65,55.7 19.42,55.7 23.15,55.7 48.35,56 86.95,56 30.25,56.05 33.1,56.05 35.5,56.05 38.1,56.05 40.75,56.05 43.45,56.05 45.9,56.05 0.6,57.4 3.2,57.4 5.9,57.4 8.5,57.4 11.2,57.4 14.1,57.4 16.9,57.4 19.501,57.4 22.3,57.4 25.35,57.4 27.95,57.4 30.7,57.4 33.6,57.4 36.4,57.4 39.1,57.4 41.95,57.4 44.7,57.4 47.4,57.4 50,57.4 52.6,57.4 55.2,57.4 57.802,57.4 60.4,57.4 62.9,57.4 65.45,57.4 67.9,57.4 70.2,57.4 72.4,57.4 74.7,57.4 77,57.4 79.45,57.4 81.75,57.4 84,57.4 86.3,57.4 88.4,57.4
  other v2: 58.3,28.1 58.9,28.1 59.5,28.1 60.1,28.1 58.3,28.7 58.9,28.7 59.5,28.7 60.1,28.7 58.3,29.3 58.9,29.3 59.5,29.3 60.1,29.3 58.3,29.9 58.9,29.9 59.5,29.9 60.1,29.9
LED_RX: J4.6 RX.1 | length 9.8
  Top Layer w0.2: J4.6 54.631,4.89 RX.1
LED_TX: J4.5 TX.1 | length 10.3
  Top Layer w0.2: J4.5 44.75,3.8 46.656,3.8 47.256,4.4 52.55,4.4 52.979,3.971 TX.1
MISO: J2.5 J2_DISP.5 U1.16 | length 70.9
  Top Layer w0.2: J2.5@14.325,53.2 14.34,53.185 J2.5 J2_DISP.5 ; U1.16 59.45,26.784 v1@60.284,25.95
  MidLayer2 w0.2: J2_DISP.5@14.35,50.625 14.35,48.375 15.2,47.525 16.7,47.525 17.225,48.05 21.148,48.05 51.348,17.85 55.84,17.85 60.3,22.31 v1(60.3,25.95)
MOSI: J2.4 J2_DISP.4 U1.17 | length 69.1
  Top Layer w0.2: J2.4@16.875,53.185 16.88,53.18 J2.4 J2_DISP.4 16.88,48.174 v1(17.504,47.55) ; U1.17 59.95,26.784 60.284,26.45 v1(60.841,26.45)
  MidLayer2 w0.2: v1(17.504,47.55) 21.153,47.55 51.203,17.5 55.985,17.5 60.841,22.356 v1(60.841,26.45)
NetC3_2: C3.2 C4.2 L1.1 L2.2 L3.1 | length 3.8
  Top Layer w0.25: L2.2 L1.1 C3.2 L3.1 C4.2
NetC4_1: C4.1 C5.2 C6.2 L3.2 | length 2.9
  Top Layer w0.25: C4.1@67.5,31.5 C4.1 L3.2 C5.2 C6.2
NetC6_1: C6.1 L4.1 | length 1
  Top Layer w0.25: C6.1 L4.1@71.45,30.5
NetC7_2: C7.2 L4.2 U2.1 | length 1.9
  Top Layer w0.25: L4.2 C7.2 74.125,30.5 74.3,30.325 U2.1@74.35,30.325
NetC8_1: C8.1 C9.2 L5.1 | length 3.3
  Top Layer w0.25: C8.1 C9.2 L5.1
NetC8_2: C8.2 U2.5 | length 1
  Top Layer w0.25: U2.5 C8.2
NetC10_2: C10.2 L5.2 RFIO.1 | length 1
  Top Layer w0.25: L5.2 C10.2
NetC11_1: C11.1 C13.2 U2.3 | length 10.3
  Top Layer w0.25: C11.1 C13.2 65.95,29.55 66.475,29.025 U2.3
NetC11_2: C11.2 L6.2 U1.22 | length 2.4
  Top Layer w0.25: U1.22 62.15,29.25 L6.2 C11.2
NetC12_2: C12.2 L6.1 U1.21 | length 2.4
  Top Layer w0.25: U1.21 62.15,28.75 L6.1 C12.2
NetC14_1: C14.1 R4.1 U2.6 | length 2.7
  Top Layer w0.25: R4.1 C14.1 U2.6@76.45,30.325
NetC15_1: C15.1 R3.1 U2.4 | length 2.7
  Top Layer w0.25: R3.1 C15.1 U2.4@76.45,29.025
NetC17_2: C17.2 L7.1 U1.7
NetFR0_2: FR0.2 FR1.2 J4.2 | length 3.7
  Top Layer w0.3: J4.2@36,4.94 J4.2@36.04,4.9 ; J4.2 J4.2@36.04,4.9 ; J4.2@36.05,4.89 J4.2@36.04,4.9 ; FR1.2 FR0.2 36.04,7.41 J4.2@36.04,4.9
NetJ4_3: J4.3 SX1262.2 | length 3.4
  Top Layer w0.2: J4.3@38.5,4.95 J4.3@38.58,4.87
  Top Layer w0.3: J4.3 38.58,6.905 39.125,7.45 SX1262.2@39.63,7.45
NetL2_1: L2.1 U1.23
NetL7_2: L7.2 U1.9
NetR15_2: R15.2 TX.2 | length 1.4
  Top Layer w0.35: TX.2 R15.2
NetR16_2: R16.2 RX.2 | length 1.4
  Top Layer w0.35: RX.2 R16.2
NSS: J1.8 U1.19 | length 62.4
  Top Layer w0.2: v1(59.8,25.4) 60.498,25.4 61.507,26.409 61.507,27.593 61.35,27.75 U1.19
  MidLayer2 w0.2: J1.8 27.2,51.93 27.2,42.493 51.493,18.2 55.657,18.2 59.8,22.343 v1(59.8,25.4)
OPT: J4.4 XTAL.2 | length 2.6
  Top Layer w0.3: XTAL.2 41.125,7.425 J4.4@41.125,4.89
SCK: J2.6 J2_DISP.6 U1.18 | length 74.9
  Top Layer w0.2: J2_DISP.6 J2.6 J2.6@11.8,53.175 ; U1.18 v1(60.9,27.1)
  MidLayer2 w0.2: J2_DISP.6@11.825,50.61 11.825,48.125 12.925,47.025 21.183,47.025 51.058,17.15 56.13,17.15 61.341,22.361 61.341,26.659 v1(60.9,27.1)
SD_CS: J2_DISP.1 R13.2 | length 1.9
  Top Layer w0.2: R13.2 J2_DISP.1 J2_DISP.1
SX_NRESET: J4.1 U1.15 | length 45.8
  Top Layer w0.2: U1.15 58.95,26.65 59.3,26.3 59.3,25.193 59.593,24.9 v1(61.85,24.9)
  MidLayer2 w0.2: J4.1 34.59,3.8 46.65,3.8 48.05,5.2 48.05,8.575 61.85,22.375 v1(61.85,24.9)
  Bottom Layer w0.2: J4.1@33.5,4.85 J4.1
T_CS: J1.5 J1_DISP.5 | length 2.5
  Top Layer w0.2: J1.5@36.025,53.15 36.04,53.135 J1_DISP.5
T_IRQ: J1.3 J1_DISP.3 | length 2.6
  Top Layer w0.2: J1_DISP.3 J1.3 J1.3@41.12,53.185
TFT_CS: J2.3 J2_DISP.3 | length 2.5
  Top Layer w0.2: J2_DISP.3 J2.3
TFT_D: J2.2 J2_DISP.2 | length 2.5
  Top Layer w0.2: J2_DISP.2 J2.2
VDD_3V3: C21.2 FR0.1 R2.1 R11.1 XTAL.1 | length 20.4
  Top Layer w0.65: v3@23.99,11.6 23.99,11.11 25.3,9.8 36,9.8 ; FR0.1 36,9.8 ; XTAL.1 41.1,9.375 40.675,9.8 36,9.8
  other v3: 24,11.6 24.7,11.6
VDD_MBED: C22.2 C23.2 J3.4 R1.2 R2.2 VDD_RADIO.1 | length 0
VDD_RADIO: C16.2 C18.2 C20.2 R1.1 U1.1 U1.10 U1.11 VDD_RADIO.2
  other v3: 61.875,32.825 56.45,33.5 61.875,33.525 56.45,34.275 56.1,34.975
VDISPLAY: C24.2 J3_DISP.5 R11.2 R12.2 R13.1 | length 68.1
  Top Layer w0.3: v1(23.99,42.59) 24.5,43.1 R13.1
  Top Layer w0.65: J3_DISP.5 20.75,2.35 22.035,3.635 23.935,3.635 24.5,4.2 C24.2 24.499,7.801 23.475,8.825 22.075,8.825
  MidLayer2 w0.3: J3_DISP.5 19.51,1.2 14.9,1.2 14.35,1.75 14.35,32.95 v1(23.99,42.59)
VR_PA: C1.2 C2.2 L1.2 U1.24
VUSB: C26.2 J3.5 R12.1
XTA: Q1.3 U1.3 | length 6.8
  Top Layer w0.127: U1.3 59.45,31.475 v1(59.7,31.725)
  Top Layer w0.35: Q1.3 v1(59.875,36.725)
  MidLayer1 w0.127: v1(59.7,31.725) 59.7,32.025 59.475,32.25 59.475,36.35 v1@59.863,36.738
XTB: Q1.1 U1.4 | length 4.6
  Top Layer w0.127: v1(58.7,31.725) 58.95,31.475 U1.4
  Top Layer w0.35: v1(58.525,34.525) Q1.1
  MidLayer1 w0.127: v1(58.525,34.525) 58.9,34.15 58.9,32.222 58.7,32.022 v1(58.7,31.725)
  MidLayer1 w0.2: v1@58.5,34.5 v1(58.525,34.525)
pads on no net: J1.1 J1.2 J1_DISP.1 J1_DISP.2 J1_DISP.4 J1_DISP.6 J1_DISP.8 J2.8 J2.9 J2.10 J2_DISP.8 J2_DISP.9 J2_DISP.10 J3.1 J3.2 J3.8 J3_DISP.1 J3_DISP.2 J3_DISP.4 J3_DISP.8 J4_DISP.1 J4_DISP.2 J4_DISP.3 J4_DISP.4 J4_DISP.5 J4_DISP.6

## Polygon pours and split planes (outlines as drawn)
GND on Top Layer "Bottom GND" (solid, pour order 7): 0.3,0.3 88.75,0.3 88.75,57.7 0.3,57.7
VDD_RADIO on Top Layer "Top Layer VDD_RADIO" (solid, pour order 6): 22.9,20.55 33.2,30.85 50.892,30.85 51.6,31.558 51.6,33.6 52.325,34.325 53.725,34.325 53.725,32.7 53.5,32.475 53.5,29.05 53.65,28.9 56,28.9 56,28.4 55.107,27.507 51.843,27.507 50.9,28.45 34.55,28.45 25,18.9 25,18 22.9,18
GND on MidLayer1 "GND midlayer1" (solid, pour order 9): 0.3,0.3 88.75,0.3 88.75,57.7 0.3,57.7
GND on Bottom Layer "Bottom GND" (solid, pour order 10): 0.3,0.3 88.75,0.3 88.75,57.7 0.3,57.7
GND on MidLayer2 "GND midlayer2" (solid, pour order 8): 0.3,0.3 88.75,0.3 88.75,57.7 0.3,57.7

## Keep-outs
Keep-Out Layer:
  lines w0.05: 0,0 89.05,0 89.05,58 0,58 0,0

## Other copper
Top Layer:
  pour cut-out: 60.75,33.125 60.75,36.25 60.825,36.325 63.8,36.325 63.8,35.325 61.45,35.325 61.45,33.125
  pour cut-out: 54.75,35.3 56.9,35.3 56.9,31.125 61.4,31.125 61.4,34.1 58,34.1 58,36.3 54.75,36.3
  region net VDD_RADIO: 55.525,35.3 55.525,33.025 56.775,33.025 56.775,35 56.475,35.3
  region net VDD_RADIO: 56.775,34.325 56.775,32.675 53.125,32.675 53.125,34.325
  region net GND: 59.8,29.9 59.8,31.25 60.1,31.55 60.1,31.84 60.225,31.965 60.475,31.965 60.6,31.84 60.6,31.625 60.44,31.465 60.315,31.465 60.15,31.3 60.15,29.9
  region net GND: 58.6,31.25 58.3,31.55 58.3,31.85 58.175,31.975 57.275,31.975 57.125,31.825 57.125,31.625 57.3,31.45 58.075,31.45 58.25,31.275 58.25,29.9 58.6,29.9
  pour cut-out: 62.3,32.075 65.048,32.075 65.05,32.073 65.05,32.045 62.3,32.045
  pour cut-out: 65.902,28.649 66.5,28.649 66.5,28.727 65.902,28.727
  region net GND: 63.975,27.6 63.975,28.975 65.898,28.975 66.227,28.649 75.525,28.649 75.525,28.125 64.7,28.125 64.7,27.6
  region net NetC10_2: 84.1,30 84.225,30 84.625,30.4 85.1,30.4 85.1,28.95 84.625,28.95 84.225,29.35 84.1,29.35
  pour cut-out: 88.8,26.5 84.5,26.5 84.5,32.85 88.8,32.85
  pour cut-out: 61.758,27.4 61.758,27.792 61.5,28.05 61.5,27.45 61.55,27.4
  region net GND: 75.975,25.55 75.975,26.775 77.1,26.775 77.1,26.275 76.35,26.275 76.35,25.55
  region net GND: 77.15,29.1 84.05,29.1 84.05,28.375 77.15,28.375
  region net GND: 74.55,31.075 68.075,31.075 68.075,32.1 68.475,32.1 68.475,31.65 74.55,31.65
  region net GND: 65.825,31.075 65.825,32.025 68.45,32.025 68.45,32.273 64.975,32.273 64.975,31.075
  region net GND: 62.351,34.875 62.351,32.075 65.381,32.075 65.381,32.9 63.025,32.9 63.025,34.875
  region net GND: 66.268,29.925 66.268,29.764 66.631,29.401 75.425,29.401 75.425,29.925
  region net VR_PA: 61.5,30.25 61.5,30.425 62.35,31.275 64.825,31.275 64.825,31.925 62.1,31.925 60.8,30.625 60.8,30.4 60.775,30.375 60.775,30.25
  region net NetL2_1: 61.15,29.6 61.625,29.6 62.2,30.175 62.775,30.175 62.775,30.825 62.125,30.825 62.125,30.6 61.425,29.9 61.15,29.9
  region net GND: 25,7.504 25,5.9 25.3,5.9 25.3,7.5
  region net GND: 22.24,3.145 24.45,3.145 24.45,2.9 22.24,2.9
  region net GND: 57.15,27.45 57.15,26.205 56.995,26.05 56.65,26.05 56.65,27.45
  region net GND: 60.1,28.4 61.635,28.4 62.305,27.73 62.305,27.625 61.908,27.625 61.483,28.05 60.1,28.05
  region net GND: 16.595,15.3 20.3,15.3 20.3,15.9 19.15,15.9 19.15,16.2 16.595,16.2
  region net VDD_RADIO: 22.9,18.75 25,18.75 25,13.65 22.9,13.65
  region net VDD_3V3: 22.9,10.1 22.9,12.8 25,12.8 25,10.1
  region net VDD_MBED: 22.3,17.35 22.3,11.9 20.45,11.9 20.45,13.25 19.55,13.25 19.25,12.95 19.25,15.15 20.45,15.15 20.45,17.35
  region net VDD_MBED: 17.4,4 18.85,4 19.45,4.6 19.45,15.15 16.85,15.15 16.85,4.55
  region net VDD_RADIO: 60.3,30.65 60.3,31.1 61.55,32.35 61.55,34.525 62.2,34.525 62.2,32.25 60.6,30.65
  region net GND: 55.65,30.65 55.65,29.95 56.425,29.95 56.8,29.575 58.3,29.575 58.3,29.95 56.925,29.95 56.75,30.125 56.75,30.425 56.525,30.65
  region net NetL7_2: 57.65,29.35 57.575,29.425 56.725,29.425 56.35,29.8 55.575,29.8 55.35,30.025 55.35,30.65 53.75,30.65 53.75,29.075 57.575,29.075 57.65,29.15
  region net NetC17_2: 53.75,32.35 56.175,32.35 56.95,31.575 56.95,31 53.75,31
  region net NetC17_2: 55.85,32.35 56.175,32.35 57.55,30.975 57.55,30.25 56.9,30.25 56.9,30.5 55.849,31.551
  pour cut-out: 60.586,27.675 60.542,27.675 57.8,27.675 57.802,27.544 60.586,27.544
  pour cut-out: 60.586,27.625 60.45,27.625 60.45,30.325 57.775,30.325 57.775,30.449 60.58,30.452 60.582,30.45
  pour cut-out: 57.925,30.425 57.925,27.65 57.775,27.65 57.775,30.425
  region net VDISPLAY: 21.7,9.65 21.7,8 22.4,8 22.4,9.65
  region net VUSB: 19.95,8.7 19.95,4.89 21.35,4.89 21.35,8.7
  region net GND: 21.5,7.85 21.5,6.1 22.45,6.1 22.45,7.4 23.45,7.4 23.45,7.85
  region net VDD_3V3: 21.7,10.75 21.7,10.05 25,10.05 25,10.75
  pour cut-out: 21.474,8.875 21.549,8.95 21.549,10.876 21.55,10.9 22.8,10.901 22.8,10.8 21.65,10.8 21.65,8.8 19.55,8.8 19.55,8.875
  pour cut-out: 22.6,9.95 22.6,7.85 22.4,7.85 22.4,9.95
  region net GND: 22.15,4.11 23.69,4.11 24.02,4.44 24.02,5.8 23.711,5.8 23.711,4.379 22.15,4.379
  region net GND: 24.975,3.635 24.975,7.4 25.2,7.4 25.2,3.635
  region net VDD_RADIO: 55.65,28.1 57.3,28.1 57.3,28.4 57,28.4 56.95,28.45 56.95,28.55 57,28.6 57.3,28.6 57.3,28.9 55.65,28.9
  region net GND: 55.04,27.241 55.749,27.95 56.75,27.95 56.75,27.725 56.7,27.675 55.875,27.675 55.725,27.525 55.725,27.2 55.04,27.2
  region net GND: 76.025,33.95 76.55,33.95 76.55,33.2 77.05,33.2 77.05,32.575 76.025,32.575
  region net GND: 84.12,29.1 84.3,28.92 84.3,28.505 84.5,28.505 84.5,27.93 83.9,27.925 83.9,29.1
  region net GND: 36.475,9.325 36.475,8.225 37.425,8.225 37.425,9.325
  pour cut-out: 65.825,31.05 65.825,32.026 68.072,32.026 68.075,31.025 68.025,31.025 68.025,31.975 65.875,31.975 65.875,31.05
  pour cut-out: 68.025,31.075 74.15,31.075 74.153,31.072 74.153,30.825 74.117,30.825 74.117,31.025 74.05,31.025 68.025,31.025
  pour cut-out: 62.106,27.873 63.975,27.873 63.975,29.075 63.9,29.075 63.9,27.945 63.855,27.99 62.106,27.99
  pour cut-out: 66.175,29.925 75.147,29.925 75.15,29.922 75.15,29.978 66.178,29.978 66.175,29.975
  pour cut-out: 76.8,30.776 77.15,30.775 77.15,30.251 79.175,30.251 79.175,30.051 80.324,30.051 80.325,30.251 84.25,30.251 84.25,30.175 80.4,30.175 80.4,30 79.1,30 79.1,30.175 77.075,30.175 77.072,30.7 76.8,30.7
  pour cut-out: 76.75,28.574 77.15,28.574 77.15,29.098 79.17,29.1 79.17,29.3 80.296,29.3 80.3,29.1 84.298,29.1 84.299,29.175 80.425,29.175 80.425,29.35 79.1,29.35 79.1,29.2 77.05,29.2 77.05,28.7 76.75,28.7
  pour cut-out: 75.797,28.574 75.793,30.775 76.125,30.776 76.125,30.65 75.95,30.65 75.95,28.625 76.1,28.625 76.1,28.574
  pour cut-out: 84.299,30.225 84.299,30.875 84.525,30.875 84.525,30.805 84.375,30.805 84.375,30.225
MidLayer2:
  pour cut-out: 60.75,33.125 60.75,36.25 60.825,36.325 63.8,36.325 63.8,35.325 61.45,35.325 61.45,33.125
  pour cut-out: 54.75,35.3 56.9,35.3 56.9,32.5 61.45,32.5 61.45,34.1 57.75,34.1 57.75,36.225 57.675,36.3 54.75,36.3
  pour cut-out: 88.8,26.5 84.5,26.5 84.5,32.85 88.8,32.85
  region net GND: 57.8,30.4 57.8,27.6 60.6,27.6 60.6,30.4
MidLayer1:
  region net GND: 59.114,36.45 59.114,31.4 59.261,31.4 59.261,36.45
  pour cut-out: 61.45,32.5 59.35,32.5 59.35,33.8 61.45,33.8
  pour cut-out: 57.975,34.1 57.975,33.575 61.125,33.575 61.125,34.1
  pour cut-out: 60.75,33.125 60.75,36.251 60.824,36.325 63.8,36.325 63.8,35.325 61.45,35.325 61.45,33.125
  pour cut-out: 54.75,35.3 56.9,35.3 56.9,32.5 59.025,32.5 59.025,34.1 57.75,34.1 57.75,36.225 57.675,36.3 54.75,36.3
  pour cut-out: 88.8,26.5 84.5,26.5 84.5,32.85 88.8,32.85
  region net GND: 57.7,30.525 57.7,27.5 60.643,27.5 60.643,30.525
Bottom Layer:
  pour cut-out: 60.75,33.125 60.75,36.25 60.825,36.325 63.8,36.325 63.8,35.325 61.45,35.325 61.45,33.125
  pour cut-out: 54.75,35.3 56.85,35.3 56.85,32.5 61.45,32.5 61.45,34.1 57.75,34.1 57.75,36.225 57.675,36.3 54.75,36.3
  region net VDD_RADIO: 55.75,35.3 55.75,32.125 62.225,32.125 62.225,34.051 61.525,34.054 61.525,32.5 56.825,32.5 56.825,35.3
  region net VDD_3V3: 23.65,11.95 23.65,11.25 25.029,11.25 25.029,11.95
  region net GND: 57.75,30.4 57.75,27.6 60.65,27.6 60.65,30.4

## Silkscreen, mask and mechanical layers (free items; w line width, h text height)
Top Overlay:
  lines w0.15: 77.2,29 77.2,25.55 53.475,25.55 53.475,36.725 77.2,36.725 77.2,30.35
  text "SX1262 Evaluation Board" at 50.725,55.225 h1.4
  text "J2" at 25.2,54.9 h1.27
  text "J1" at 45.8,54.9 h1.27
  text "1" at 47.511,52.71 h1
  text "1" at 26,52.61 h1
  text "PCB_E428V03A 5017" at 56.65,52.55 h1.27
  text "SX1262" at 69.224,37.3 h1.4
  text "Freq Band:" at 71.35,9.3 h1.27
  text "J3" at 9.524,6.85 h1.27
  text "J4" at 32.45,6.85 h1.27
  text "1" at 8.911,4.41 h1
  text "1" at 31.731,4.415 h1
Bottom Overlay:
  text "RoHS" at 16.594,26.42 h2.2 r270
  text "compliant" at 15.044,24.37 h2.2 r270
  text "PCB_428V03A 5017" at 2,17.9 h1.27 r270
Bottom Solder:
  region: 57.9,30.3 57.9,27.7 60.5,27.7 60.5,30.3
Mechanical 3:
  text "Origin(0;0)" at -9.95,-2.35 h1
Mechanical 14:
  the board outline again, w0.05

## Dimensions
0,0 to 0,58 on Mechanical 3
0,0 to 89,0 on Mechanical 3
0,0 to 61,5 on Mechanical 3
0,0 to 61,5 on Mechanical 3

## Text inside footprints (layer, text, board x,y; h text height)
Q1: Top Overlay "1" at 57.7,34.1 h0.5
Shield: Top Overlay "1" at 49.3,23.15 h0.6
U1: Top Overlay "1" at 61.9,31.15 h0.6